# Altium PCB esp32_audio_pcbv2.PcbDoc
Units mil, origin at the board's own origin, x right, y up, seen from the top; angles counter-clockwise.
Board outline 1345 x 1610 mil, 2 copper layers (Top Layer, Bottom Layer); 31 components, 38 nets, 116 pads, 66 vias.
Unrouted connection lines stored in the file: 25.
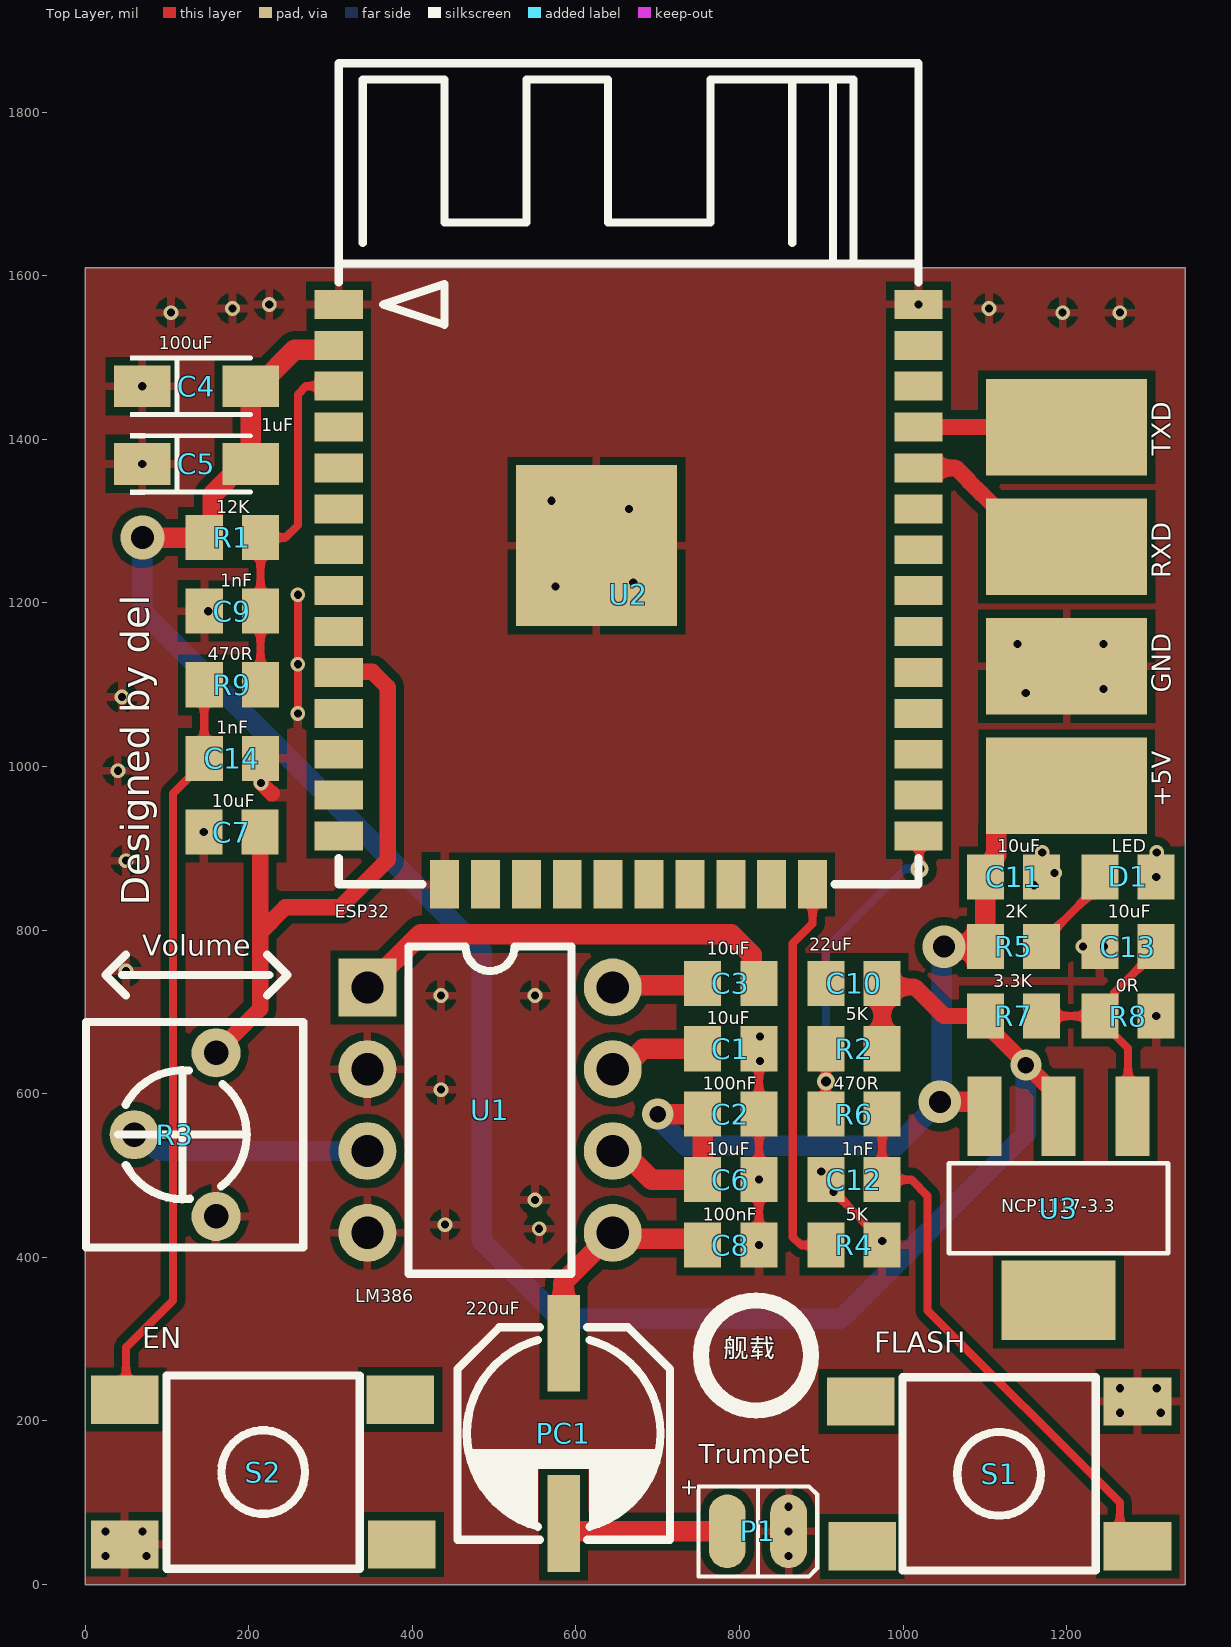
[diagram p0: Top Layer view]
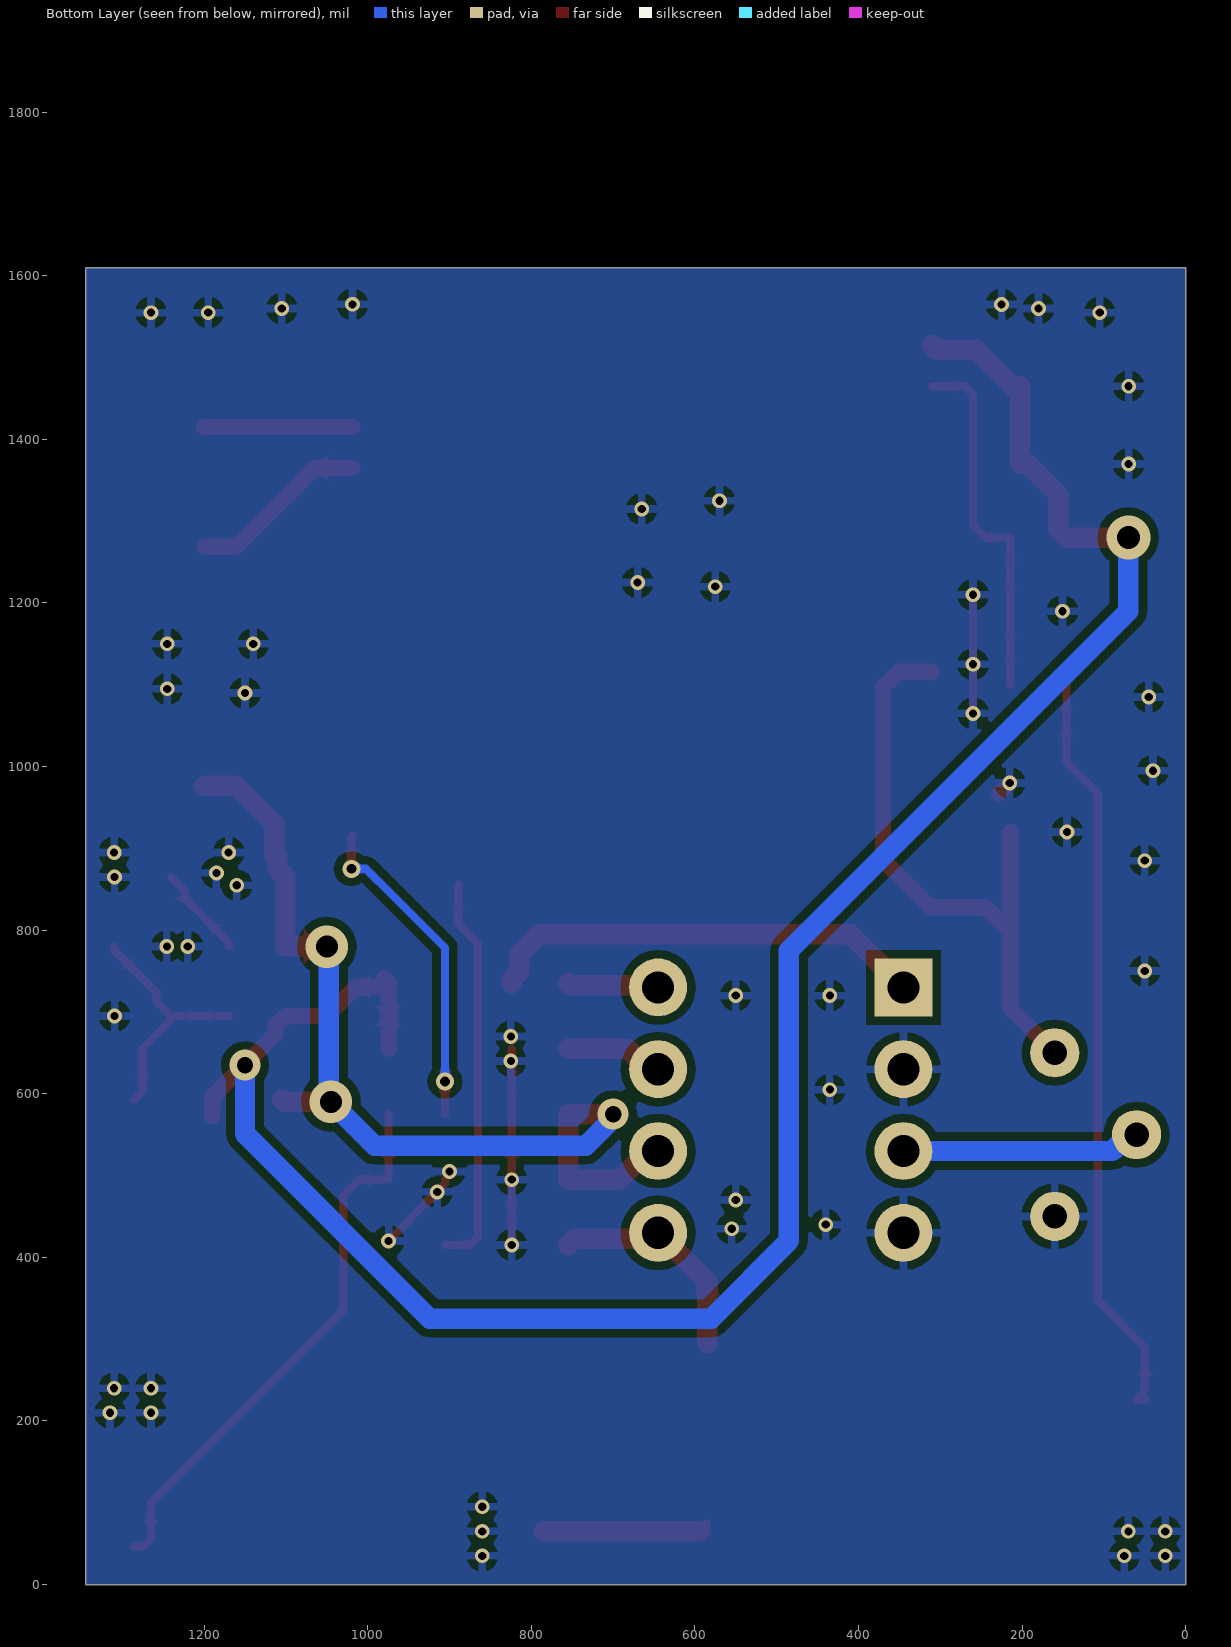
[diagram p1: Bottom Layer view, seen from below]

## Layer stack, top to bottom
Top Solder: solder mask 0.4, Solder Resist, Dk 3.5
Top Layer: signal copper 1.4
Dielectric 1: dielectric 12.6, FR-4, Dk 4.8
Bottom Layer: signal copper 1.4
Bottom Solder: solder mask 0.4, Solder Resist, Dk 3.5

## Board outline
0,0 0,1610 1345,1610 1345,0

## Design rules (kind name [scope] priority, off if disabled: settings)
Clearance [All] p1: gap=10 ignorepadtopadclearanceinfootprint=FALSE except(0: Arc-Hole Track-Hole SMDPad-Hole THPad-Hole Via-Hole Fill-Hole Poly-Hole Region-Hole Text-Hole)
PolygonConnect [All] p1: connectstyle=Relief reliefconductorwidth=10 reliefentries=4 polygonreliefangle="90 Angle" airgapwidth=10
RoutingVias [All] p1: holewidth=12 width=22 viastyle="Through Hole" minholewidth=10 minwidth=18 maxholewidth=28 maxwidth=54
SolderMaskExpansion [All] p1: expansion=4
Width [All] p1: maxlimit=25 minlimit=7 preferedwidth=10
30 further rules are at their usual default settings.

## Components (designator, comment, footprint, x,y, rotation, side; value= is the part's Value field where it differs from the comment)
C1 "10uF" 0805 823.9,655 r180 top
C2 "100nF" 0805 823.9,575 r180 top
C3 "10uF" 0805 755,735 r0 top
C4 "100uF" 3216A_CAP_TAN 136.1,1465 r180 top
C5 "1uF" 3216A_CAP_TAN 136.1,1370 r180 top
C6 "10uF" 0805 823.9,495 r180 top
C7 "10uF" 0805 213.9,920 r180 top
C8 "100nF" 0805 823.9,415 r180 top
C9 "1nF" CAP0805 180,1190 r0 top
C10 "22uF" CAP0805 940,735 r0 top
C11 "10uF" CAP0805 1135,865 r180 top
C12 "1nF" CAP0805 940,495 r180 top
C13 "10uF" CAP0805 1275,780 r0 top
C14 "1nF" CAP0805 180,1010 r0 top
D1 "LED" CAP0805 1275,865 r0 top
P1 "BUZZ" BATTERY 785,65 r270 top
PC1 "220uF" DIOCAP 585,295 r270 top
R1 "12K" CAP0805 180,1280 r180 top
R2 "5K" CAP0805 940,655 r0 top
R3 "RES_C" RES_C 110,550 r90 top
R4 "5K" CAP0805 940,415 r180 top
R5 "2K" CAP0805 1135,780 r180 top
R6 "470R" CAP0805 940,575 r0 top
R7 "3.3K" CAP0805 1135,695 r180 top
R8 "0R" CAP0805 1275,695 r180 top
R9 "470R" CAP0805 180,1100 r180 top
S1 "KEY" BUTTON_6x6x6 1286.61,223.82 r180 top
S2 "KEY" BUTTON_6x6x6 48.39,48.87 r0 top
U1 "LM386" DIP_8_LM386 495,580 r270 top
U2 "ESP32" ESP32S 664.37,1210.55 r270 top
U3 "NCP1117-3.3" NCP1117-33-SOT223 1190,460 r90 top

## Footprints (in the part's own frame and the unit in brackets; to place one, negate y for a bottom-side part, rotate by r counter-clockwise, add the part's x,y. Pads: shape width x height; smd on the part's side, far side on the other; paste and mask are expansions set on the pad)
0805 [mm]
  rect 1.15x1.4 smd: 1(0,0) 2(1.75,0)
  body extent -0.23,-0.7 1.97,0.7, height 0.6
3216A_CAP_TAN [mil]
  rect 69.19x51.02 smd: 1(66.39,0) 2(-66.39,0)
  silkscreen extent -66,-37 81,37, body extent -62,-35 72,35, height 71
BATTERY [mil]
  oval 90x45 smd: 1(0,0) 2(0,75)
  silkscreen extent -55,-35 55,110
BUTTON_6x6x6 [mm]
  rect 2.1x1.5 smd: 1(0,0) 2(0,4.5) 3(8.6,0) 4(8.55,4.5)
  silkscreen extent 1.3,-0.75 7.3,5.25, body extent -0.79,-0.95 9.24,5.39, height 5.55
CAP0805 [mm]
  rect 1.15x1.4 smd: 1(-0.875,0) 2(0.875,0)
  body extent -1.1,-0.7 1.1,0.7, height 0.6
DIOCAP [mm]
  rect 3x1 smd: 1(0,0) 2(5.6,0)
  silkscreen extent -0.5,-3.3 6.1,3.3, body extent -0.92,-3.32 6.37,3.27, height 5.9
DIP_8_LM386 [mm]
  rect 1.8x1.8 hole 1: 1(-3.81,-3.81)
  round 1.8 hole 1: 2(-1.27,-3.81) 3(1.27,-3.81) 4(3.81,-3.81) 5(3.81,3.81) 6(1.27,3.81) 7(-1.27,3.81) 8(-3.81,3.81)
  silkscreen extent -5.08,-2.53 5.08,2.53, body extent -5.71,-3.81 5.72,4.06, height 4.19
ESP32S [mm]
  rect 0.9x1.5 smd: 1(-9.005,-9) 2(-7.735,-9) 3(-6.465,-9) 4(-5.195,-9) 5(-3.925,-9) 6(-2.655,-9) 7(-1.385,-9) 8(-0.115,-9) 9(1.155,-9) 10(2.425,-9) 11(3.695,-9) 12(4.965,-9) 13(6.235,-9) 14(7.505,-9) 25(7.505,9) 26(6.235,9) 27(4.965,9) 28(3.695,9) 29(2.425,9) 30(1.155,9) 31(-0.115,9) 32(-1.385,9) 33(-2.655,9) 34(-3.925,9) 35(-5.195,9) 36(-6.465,9) 37(-7.735,9) 38(-9.005,9)
  rect 1.5x0.9 smd: 15(9.005,-5.715) 16(9.005,-4.445) 17(9.005,-3.175) 18(9.005,-1.905) 19(9.005,-0.635) 20(9.005,0.635) 21(9.005,1.905) 22(9.005,3.175) 23(9.005,4.445) 24(9.005,5.715)
  rect 5x5 smd: 39(-1.51,-1)
  silkscreen extent -16.5,-9 9,9, body extent -16.4,-9.04 9.14,9.04, height 3
NCP1117-33-SOT223 [mm]
  rect 2.465x1.05 smd: 1(2.858,-2.3) 2(2.858,0) 3(2.858,2.3)
  rect 2.465x3.54 smd: 4(-2.857,0)
  silkscreen extent -1.4,-3.4 1.4,3.4, body extent -3.61,-3.25 3.35,3.25, height 1.65
RES_C [mil]
  round 60 hole 30: 1(-100,-50) 2(0,50) 3(100,-50)
  silkscreen extent -138,-157 138,109, body extent -130,-170 130,105, height 177

## Part data
C1 C2 C3 C4 C5 C6 C7 C8 C9 C10 C11 C12 C13 C14: library part CAP, "电容"
PC1: library part PCAP, "极性电容"
R1 R2 R4 R5 R6 R7 R8 R9: library part RES, "电阻"
U3: "NCP1117-3.3-SOT223"

## Free pads (board coordinates)
  rect 196.85x118.11 smd: 1(1200,976.67) 2(1200,1122.78) 3(1200,1268.89) 4(1200,1415)

## Via types
v1: diameter 18, hole 10, Top Layer to Bottom Layer, tented both sides, 59 vias
v2: diameter 38, hole 20, Top Layer to Bottom Layer, tented both sides, 2 vias
v3: diameter 22, hole 12, Top Layer to Bottom Layer, tented both sides, 2 vias
v4: diameter 52, hole 27, Top Layer to Bottom Layer, tented both sides, 2 vias
v5: diameter 54, hole 28, Top Layer to Bottom Layer, tented both sides, 1 vias

## Nets (pads, with @x,y where several pads share a name; then routed paths per layer and width w, separated by ;. In a path a pad name is that pad's centre, name@x,y a point inside that pad or via, vN(x,y) a via of type N, cw(c..) or ccw(c..) an arc to the next point about the centre after c; other vN are vias at no path point)
3.3V: C4.2 C5.2 C10.2 R1.2 R2.2 R7.2 U2.2 U3.2 | length 2719.8
  Top Layer w20: R2.2 C10.2@974.45,730.55 ; C10.2@980,740.55 C10.2 C10.2@974.45,730.55 ; U3.2 1190,595.97 1113.19,672.78 1113.19,682.36 R7.2 1050,695 1014.45,730.55 C10.2@974.45,730.55
  Top Layer w25: v5(70,1280) R1.2 155.69,1290.14 155.69,1332.28 193.41,1370 C5.2 C4.2 211.57,1465 256.44,1509.86 304.82,1509.86 U2.2
  Bottom Layer w25: v5(70,1280) 70,1190 485,775 485,420 580,325 924,325 1150,551 v2(1150,635)
+5: C2.2 C6.2 C11.2 pad.1 R5.2 U1.6 U3.3 | length 1213.8
  Top Layer w25: U1.6 657.41,530 692.41,495 C6.2 C2.2 v2(700,575) ; v4(1045,590) 1101.95,590 U3.3@1104.45,592.5 ; v4(1050,780) R5.2 C11.2 1110.69,875.14 1110.69,888.26 1114.07,891.64 1114.07,930.11 1160.63,976.67 pad.1
  Bottom Layer w25: U1.6 U1.6@651.5,536.5 ; v2@700,570 733.5,536.5 991.5,536.5 v4(1045,590) 1047.5,592.5 1047.5,777.5 v4(1050,780)
EN: C9.2 R1.1 R9.1 U2.3 | length 446
  Top Layer w10: R9.1 C9.2 R1.1 245,1280 260,1295 260,1455 270.08,1465.08 U2.3
GND: C1.1 C2.1 C4.1 C5.1 C6.1 C7.2 C8.1 C9.1 C10.1 C11.1 C12.2 C13.1 C14.2 D1.2 P1.2 pad.2 R3.1 R4.1 R8.1 S1.1 S2.1 U1.2 U1.4 U2.1 U2.15 U2.38 U2.39 | length 507.6
  Top Layer w10: v1(260,1065) v1(260,1125) v1(260,1210) ; v1(823.9,415) v1(823.9,495) C2.1 C1.1 ; C12.2 905.55,490.08 948.82,446.81 948.82,445.63 v1(974.45,420)
  Top Layer w19: v1(215,980) 227.94,967.06 228.7,967.06
  other v1: 25,35 75,35 860,35 25,65 70,65 860,65 860,95 1265,210 1315,210 1265,240 1310,240 555,435 440,440 550,470 915,480 900,505 435,605 825,640 825,670 1309.45,695 435,720 550,720 50,750 1220,780 1245.55,780 1160,855 1309.45,865 1185,870 50,885 1170,895 1310,895 145,920 40,995 45,1085 1150,1090 1245,1095 1140,1150 1245,1150 150.55,1190 575,1220 670,1225 665,1315 570,1325 69.71,1370 69.71,1465 105,1555 1195,1555 1265,1555 180,1560 1105,1560 225,1565 1018.7,1565.08
IO0: R2.1 R6.1 U2.25 | length 438.6
  Top Layer w10: R6.1 v3(905.55,615) R2.1 ; U2.25 1020,913.78 v3(1020,875)
  Bottom Layer w10: v3(905.55,615) 905.55,778.53 969.36,842.34 1002.02,875 v3(1020,875)
IO2: R4.2 U2.24 | length 485.8
  Top Layer w10: U2.24 889.37,807.93 865,783.56 865,425 875,415 R4.2
IO4: U2.26
IO5: U2.29
IO12: U2.14
IO13: U2.16
IO14: U2.13
IO15: U2.23
IO16: U2.27
IO17: U2.28
IO18: U2.30
IO19: U2.31
IO21: U2.33
IO22: U2.36
IO23: U2.37
IO25: C7.1 R3.3 U2.10 | length 764.4
  Top Layer w20: R3.3 213.9,703.9 213.9,797.18 ; C7.1 213.9,797.18 ; U2.10 310.96,1116 351,1116 370,1097 370,886 312,828 244.72,828 213.9,797.18
IO26: U2.11
IO27: U2.12
IO32: U2.8
IO33: U2.9
IO34: U2.6
IO35: U2.7
NetC1_2: C1.2 U1.7 | length 120.4
  Top Layer w25: U1.7 657.41,630 682.41,655 C1.2
NetC3_1: C3.1 U1.8 | length 112.1
  Top Layer w25: U1.8 647.5,732.5 752.5,732.5 C3.1
NetC3_2: C3.2 U1.1 | length 546
  Top Layer w25: U1.1 410,795 790,795 815,770 815,748.82 823.9,739.92 C3.2
NetC8_2: C8.2 PC1.1 U1.5 | length 276.1
  Top Layer w25: PC1.1 585,370 U1.5 652.5,422.5 747.5,422.5 C8.2
NetC12_1: C12.1 R6.2 S1.2 | length 685.4
  Top Layer w10: R6.2 C12.1 1010,495 1030,475 1030,335 1265,100 1265,56.46 1274.8,46.65 S1.2
NetC13_2: C13.2 R7.1 R8.2 U3.1 | length 305.8
  Top Layer w10: R7.1 R8.2 ; U3.1@1285.55,592.5 1275,603.05 1275,655.63 1240.55,690.08 R8.2 ; C13.2 1309.45,775.08 1258.19,723.82 1258.19,712.64 R8.2
NetC14_1: C14.1 R9.2 S2.2 | length 929.6
  Top Layer w10: S2.2 60.2,226.04 50,236.24 50,290 107.36,347.36 107.36,966.89 145.55,1005.08 C14.1 R9.2
NetD1_1: D1.1 R5.1 | length 114.5
  Top Layer w10: R5.1 1169.45,784.92 1222.91,838.39 1222.91,847.36 D1.1
NetP1_1: P1.1 PC1.2 | length 203.9
  Top Layer w10: PC1.2 PC1.2@594.53,65
  Top Layer w25: PC1.2@594.53,65 P1.1
NetR3_2: R3.2 U1.3 | length 293.3
  Bottom Layer w25: R3.2 69.47,550 89.47,530 U1.3
RXD0: pad.3 U2.34 | length 221.6
  Top Layer w20: U2.34 1018.78,1365 1065,1365 1080.36,1349.64 1080.36,1348.88 1095.72,1333.52 1096,1333.52 1160.63,1268.89 pad.3
TXD0: pad.4 U2.35 | length 181.3
  Top Layer w20: U2.35 1199.92,1415.08 pad.4
pads on no net: S1.3 S1.4 S2.3 S2.4 U2.4 U2.5 U2.17 U2.18 U2.19 U2.20 U2.21 U2.22 U2.32 U3.4

## Polygon pours and split planes (outlines as drawn)
GND on Bottom Layer "GND_L02_P003" (solid, remove dead copper, pour order 3): 0,-0.38 1345,-0.38 1345,1609.62 0,1609.62
GND on Top Layer "GND_L01_P001" (solid, remove dead copper, pour order 1): 0.41,0.1 1345.41,0.1 1345.41,1610.1 0.41,1610.1

## Silkscreen, mask and mechanical layers (free items; w line width, h text height)
Top Overlay:
  circle w19.68: c820,280 r67.27
  lines w10: 45,745 225,745 ; 50,720 25,745 50,770 ; 222.5,720 247.5,745 222.5,770
  text "TXD" at 1335,1380 h39.37 r90
  text "RXD" at 1335,1230 h39.37 r90
  text "GND" at 1335,1090 h39.37 r90
  text "+5V" at 1335,950 h39.37 r90
  text "Designed by del" at 90,830 h59.06 r90
  text "Volume" at 70,760 h43.31
  text "EN" at 70,280 h43.31
  text "FLASH" at 965,275 h43.31
  text "舰载" at 780,270 h39.37
  text "Trumpet" at 750,140 h39.37
Mechanical 1:
  the board outline again, w10

## Text inside footprints (layer, text, board x,y; h text height)
P1: Top Overlay "+" at 730,130 h20 r270